# Altium PCB SiC BOOST CONVERTER.PcbDoc
Units mil, origin at the board's own origin, x right, y up, seen from the top; angles counter-clockwise.
Board outline 6000 x 4000 mil, 2 copper layers (Top Layer, Bottom Layer); 78 components, 53 nets, 191 pads, 0 vias.
Unrouted connection lines stored in the file: 137.
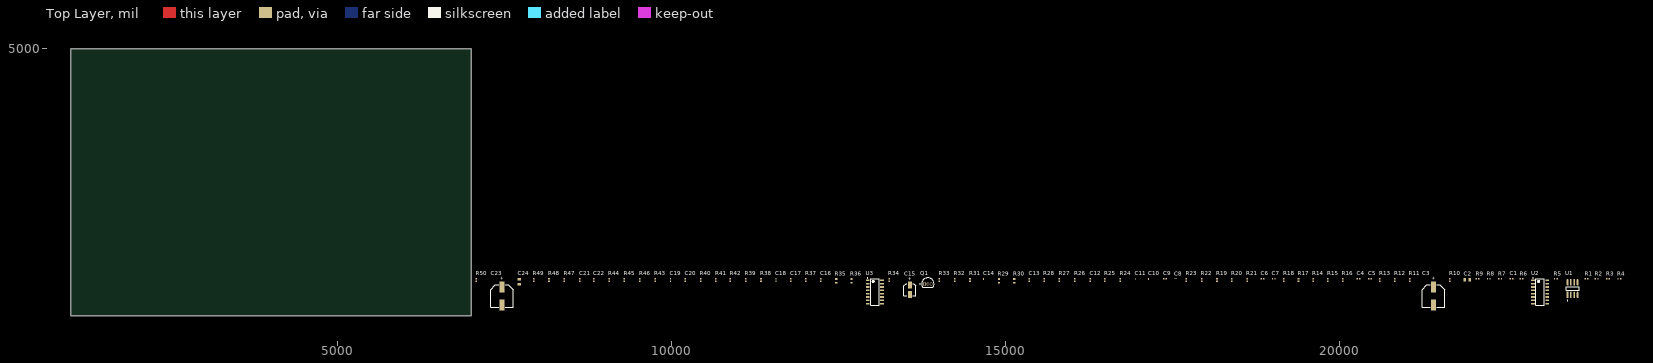
[diagram p0: Top Layer view]
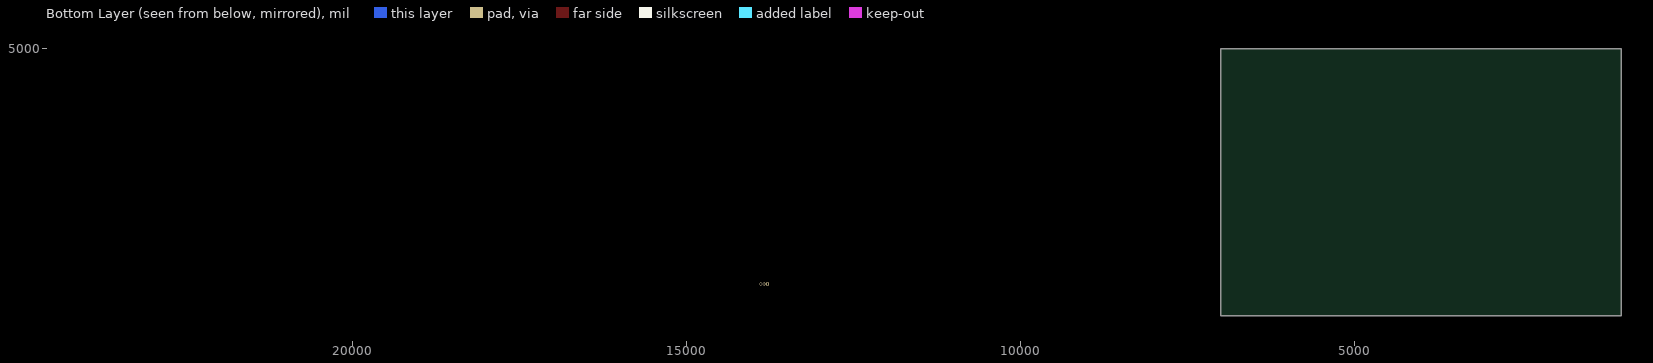
[diagram p1: Bottom Layer view, seen from below]

## Layer stack, top to bottom
Top Solder: solder mask 0.4, Solder Resist, Dk 3.5
Top Layer: signal copper 1.4
Dielectric 1: dielectric 12.6, FR-4, Dk 4.8
Bottom Layer: signal copper 1.4
Bottom Solder: solder mask 0.4, Solder Resist, Dk 3.5

## Board outline
1000,1000 7000,1000 7000,5000 1000,5000

## Design rules (kind name [scope] priority, off if disabled: settings)
Clearance [All] p1: gap=10 ignorepadtopadclearanceinfootprint=FALSE
PolygonConnect [All] p1: connectstyle=Relief reliefconductorwidth=10 reliefentries=4 polygonreliefangle="90 Angle" airgapwidth=10
RoutingVias [All] p1: holewidth=28 width=50 viastyle="Through Hole" minholewidth=28 minwidth=50 maxholewidth=28 maxwidth=50
SolderMaskExpansion [All] p1: expansion=4 istentingtop=FALSE
Width [All] p1: maxlimit=10 minlimit=10 preferedwidth=10
30 further rules are at their usual default settings.

## Components (designator, comment, footprint, x,y, rotation, side; value= is the part's Value field where it differs from the comment)
C1 "1nF 50V" WCAP-CSGP_0402_L1W0.5H0.5 22580,1555 r0 top
C2 "100nF 50V" WCAP-CSGP_0805_L2W1.25H0.8_Reflow 21920,1535 r0 top
C3 "63V 47uF" WCAP-ASLI_D8H10.5 21410,1295 r90 top
C4 "470pF 25V" WCAP-CSGP_0402_L1W0.5H0.5 20290,1555 r0 top
C5 "470pF 25V" WCAP-CSGP_0402_L1W0.5H0.5 20460,1555 r0 top
C6 "470pF 25V" WCAP-CSGP_0402_L1W0.5H0.5 18850,1555 r0 top
C7 "470pF 25V" WCAP-CSGP_0402_L1W0.5H0.5 19020,1555 r0 top
C8 "10nF 25V" WCAP-CSGP_0201_L0.6W0.3H0.3 17545,1555 r0 top
C9 "100nF 25V" WCAP-CSGP_0402_L1W0.5H0.5 17390,1555 r0 top
C10 "1nF 25V" WCAP-CSGP_0201_L0.6W0.3H0.3 17145,1550 r90 top
C11 "10nF 25V" WCAP-CSGP_0201_L0.6W0.3H0.3 16945,1550 r90 top
C12 "100nF 25V" WCAP-CSGP_0402_L1W0.5H0.5 16270,1535 r90 top
C13 "100nF 25V" WCAP-CSGP_0402_L1W0.5H0.5 15360,1535 r90 top
C14 "1nF 25V" WCAP-CSGP_0201_L0.6W0.3H0.3 14675,1550 r90 top
C15 "25V 10uF" WCAP-AS5H_D4H5.5 13570,1390 r90 top
C16 "100nF 25V" WCAP-CSGP_0402_L1W0.5H0.5 12235,1535 r90 top
C17 "100nF 25V" WCAP-CSGP_0402_L1W0.5H0.5 11785,1535 r90 top
C18 "100nF 25V" WCAP-CSGP_0402_L1W0.5H0.5 11565,1535 r90 top
C19 "470pF 25V" WCAP-CSGP_0402_L1W0.5H0.5 9985,1535 r90 top
C20 "470pF 25V" WCAP-CSGP_0402_L1W0.5H0.5 10205,1535 r90 top
C21 "470pF 25V" WCAP-CSGP_0402_L1W0.5H0.5 8625,1535 r90 top
C22 "470pF 25V" WCAP-CSGP_0402_L1W0.5H0.5 8835,1535 r90 top
C23 "63V 47uF" WCAP-ASLI_D8H10.5 7460,1295 r90 top
C24 "100nF 50V" WCAP-CSGP_0805_L2W1.25H0.8_Reflow 7720,1510 r90 top
Q1 "TS431" TO-92 13840,1475 r0 top value=Shunt
R1 "100KΩ" WRIS-RSKS_0402 23705,1550 r0 top
R2 "100KΩ" WRIS-RSKS_0402 23855,1550 r0 top
R3 "100KΩ" WRIS-RSKS_0402 24025,1550 r0 top
R4 "100KΩ" WRIS-RSKS_0402 24195,1550 r0 top
R5 "28KΩ" WRIS-RSKS_0402 23245,1550 r0 top
R6 "88.7KΩ" WRIS-RSKS_0402 22730,1550 r0 top
R7 "100KΩ" WRIS-RSKS_0402 22410,1550 r0 top
R8 "28KΩ" WRIS-RSKS_0402 22240,1550 r0 top
R9 "200KΩ" WRIS-RSKS_0402 22070,1550 r0 top
R10 "27KΩ" WRIS-RSKS_0402 21655,1535 r90 top
R11 "22.1KΩ" WRIS-RSKS_0402 21055,1535 r90 top
R12 "100KΩ" WRIS-RSKS_0402 20835,1535 r90 top
R13 "4.7KΩ" WRIS-RSKS_0402 20610,1535 r90 top
R14 "20Ω" WRIS-RSKS_0402 19610,1535 r90 top
R15 "20Ω" WRIS-RSKS_0402 19830,1535 r90 top
R16 "20Ω" WRIS-RSKS_0402 20050,1535 r90 top
R17 "4.7KΩ" WRIS-RSKS_0402 19390,1535 r90 top
R18 "100KΩ" WRIS-RSKS_0402 19170,1535 r90 top
R19 "20Ω" WRIS-RSKS_0402 18170,1535 r90 top
R20 "20Ω" WRIS-RSKS_0402 18390,1535 r90 top
R21 "20Ω" WRIS-RSKS_0402 18620,1535 r90 top
R22 "100KΩ" WRIS-RSKS_0402 17940,1535 r90 top
R23 "330KΩ" WRIS-RSKS_0402 17710,1535 r90 top
R24 "100KΩ" WRIS-RSKS_0402 16720,1535 r90 top
R25 "28KΩ" WRIS-RSKS_0402 16490,1535 r90 top
R26 "1KΩ" WRIS-RSKS_0402 16040,1535 r90 top
R27 "2KΩ" WRIS-RSKS_0402 15810,1535 r90 top
R28 "28KΩ" WRIS-RSKS_0402 15580,1535 r90 top
R29 "75KΩ" WRIS-RSKS_0603_Reflow 14905,1520 r90 top
R30 "75KΩ" WRIS-RSKS_0603_Reflow 15135,1520 r90 top
R31 "22Ω" WRIS-RSKS_0402 14470,1535 r90 top
R32 "56KΩ" WRIS-RSKS_0402 14240,1535 r90 top
R33 "1KΩ" WRIS-RSKS_0402 14010,1535 r90 top
R34 "10KΩ" WRIS-RSKS_0402 13260,1535 r90 top
R35 "75KΩ" WRIS-RSKS_0603_Reflow 12465,1520 r90 top
R36 "75KΩ" WRIS-RSKS_0603_Reflow 12695,1520 r90 top
R37 "1KΩ" WRIS-RSKS_0402 12010,1535 r90 top
R38 "330KΩ" WRIS-RSKS_0402 11340,1535 r90 top
R39 "4.7KΩ" WRIS-RSKS_0402 11110,1535 r90 top
R40 "20Ω" WRIS-RSKS_0402 10435,1535 r90 top
R41 "20Ω" WRIS-RSKS_0402 10665,1535 r90 top
R42 "20Ω" WRIS-RSKS_0402 10880,1535 r90 top
R43 "4.7KΩ" WRIS-RSKS_0402 9755,1535 r90 top
R44 "20Ω" WRIS-RSKS_0402 9065,1535 r90 top
R45 "20Ω" WRIS-RSKS_0402 9295,1535 r90 top
R46 "20Ω" WRIS-RSKS_0402 9525,1535 r90 top
R47 "22.1KΩ" WRIS-RSKS_0402 8395,1535 r90 top
R48 "27KΩ" WRIS-RSKS_0402 8165,1535 r90 top
R49 "200KΩ" WRIS-RSKS_0402 7935,1535 r90 top
R50 "88.7KΩ" WRIS-RSKS_0402 7075,1535 r90 top
U1 "LM358DR" SOIC-08-IPC_A 23495,1405 r90 top value=OPAMP
U2 "UCC28221D" D0016A_N 23010,1355 r0 top value="BOOST PWM"
U3 "UCC28221D" D0016A_N 13045,1355 r0 top value="BOOST PWM"

## Footprints (in the part's own frame and the unit in brackets; to place one, negate y for a bottom-side part, rotate by r counter-clockwise, add the part's x,y. Pads: shape width x height; smd on the part's side, far side on the other; paste and mask are expansions set on the pad)
D0016A_N [mm] "SOIC, 16-Leads, Body 10x4mm, Pitch 1.27mm, IPC Medium Density"
  rrect17% 1.45x0.6 smd: 1(-2.725,4.445) 2(-2.725,3.175) 3(-2.725,1.905) 4(-2.725,0.635) 5(-2.725,-0.635) 6(-2.725,-1.905) 7(-2.725,-3.175) 8(-2.725,-4.445) 9(2.725,-4.445) 10(2.725,-3.175) 11(2.725,-1.905) 12(2.725,-0.635) 13(2.725,0.635) 14(2.725,1.905) 15(2.725,3.175) 16(2.725,4.445)
  silkscreen extent -2.85,-5 1.6,5.42, body extent -3,-4.95 3,4.95, height 1.59
SOIC-08-IPC_A [mil]
  rect 97.4x24.54 smd paste+0 mask+0: 1(-95.12,75)
  rrect100% 97.4x24.54 smd paste+0 mask+0: 2(-95.12,25) 3(-95.12,-25) 4(-95.12,-75) 5(95.12,-75) 6(95.12,-25) 7(95.12,25) 8(95.12,75)
  silkscreen extent -184,-96 27,96, body extent -164,-116 164,116, height 10
TO-92 [mm] "TO, 3-Leads, Body Dia 4.7mm, Pitch 1.27mm"
  rect 1.05x1.05 hole 0.8: 1(-1.27,0)
  round 1.05 hole 0.8: 2(0,0) 3(1.27,0)
  silkscreen extent -3.07,-1.34 2.35,2.35, body extent -2.35,-1.33 2.36,2.36, height 7.87
WCAP-AS5H_D4H5.5 [mm] "Aluminum Electrolytic Capacitors, 4x5.5mm"
  rect 2.6x1.6 smd: 1(1.8,0) 2(-1.8,0)
  silkscreen extent -2.25,-2.25 2.25,2.25, body extent -2.5,-2.15 2.5,2.15, height 5.5
WCAP-ASLI_D8H10.5 [mm] "Aluminium Electrolytic V-Chip SMT Capacitors, 8x10.5mm"
  rect 4.2x1.9 smd: 1(3.5,0) 2(-3.5,0)
  silkscreen extent -4.25,-4.25 4.25,4.25, body extent -4.5,-4.15 4.5,4.15, height 10.5
WCAP-CSGP_0201_L0.6W0.3H0.3 [mm] "Ceramic Capacitors, body 0.60x0.30mm"
  rect 0.21x0.3 smd: 1(-0.22,0) 2(0.22,0)
  body extent -0.3,-0.15 0.3,0.15, height 0.3
WCAP-CSGP_0402_L1W0.5H0.5 [mm] "Ceramic Capacitors, body 1x0.5mm"
  rect 0.5x0.5 smd: 1(-0.5,0) 2(0.5,0)
  body extent -0.5,-0.25 0.5,0.25, height 0.5
WCAP-CSGP_0805_L2W1.25H0.8_Reflow [mm] "Ceramic Capacitors, body 2x1.25mm"
  rect 0.9x1.3 smd: 1(-0.95,0) 2(0.95,0)
  body extent -1,-0.62 1,0.63, height 0.8
WRIS-RSKS_0402 [mm] "Fixed Thick Film, body 1.00 x 0.50 mm"
  rect 0.5x0.6 smd: 1(-0.5,0) 2(0.5,0)
  body extent -0.5,-0.25 0.5,0.25, height 0.35
WRIS-RSKS_0603_Reflow [mm] "Fixed Thick Film, body 1.60 x 0.80 mm"
  rect 0.6x0.9 smd: 1(-0.75,0) 2(0.75,0)
  body extent -0.8,-0.4 0.8,0.4, height 0.45

## Part data
C1: library part 885012005067, "WCAP-CSGP Multilayer Ceramic Chip Capacitor, General Purpose, size 0402, NP0, 1nF, 50VDC", Capacitance=1nF, Capacitance Tolerance=+/-5%, Case/Size Code=0402, Insulation Resistance=10GOhm, Manufacturer="Wurth Elektronik", Operating Temperature Max=125°C, Operating Temperature Min=-55°C, Rated Voltage (DC)=50V, Category="Multilayer Ceramic Chip Capacitors", Ceramic Type=NP0, ComponentLink1Description="Website Link", ComponentLink1URL=https://www.we-online.com/redexpert/article/885012005067?ad, ComponentLink2Description="Datasheet Link", ComponentLink2URL=https://www.we-online.com/redexpert/spec/885012005067?ad, Height=0.5mm, Length=1mm, Manufacturer Part Number=885012005067, Match Code=WCAP-CSGP, Mount="Surface Mount", Packaging="Tape and Reel", Q Factor=1000, Technical Reference=NP00402102J050DFCT10000, Width=0.5mm, Simulation ModelName=0402_885012005067_1nF, Simulation PortMap=(1:1),(2:2)
C2 C24: library part 885012207098, "WCAP-CSGP Multilayer Ceramic Chip Capacitor, General Purpose, size 0805, X7R, 100nF, 50VDC", Capacitance=100nF, Capacitance Tolerance=+/-10%, Case/Size Code=0805, Insulation Resistance=5GOhm, Manufacturer="Wurth Elektronik", Operating Temperature Max=125°C, Operating Temperature Min=-55°C, Rated Voltage (DC)=50V, Category="Multilayer Ceramic Chip Capacitors", Ceramic Type=X7R, ComponentLink1Description="Website Link", ComponentLink1URL=https://www.we-online.com/redexpert/article/885012207098?ad, ComponentLink2Description="Datasheet Link", ComponentLink2URL=https://www.we-online.com/redexpert/spec/885012207098?ad, Dissipation Factor=2.5%, Height=0.8mm, Length=2mm, Manufacturer Part Number=885012207098, Match Code=WCAP-CSGP, Mount="Surface Mount", Packaging="Tape and Reel", Technical Reference=X7R0805104K050DFCT10000, Width=1.25mm, Simulation ModelName=0805_885012207098_100nF, Simulation PortMap=(1:1),(2:2)
C3 C23: library part 865080753013, "WCAP-ASLI Aluminum Electrolytic Capacitor, V-Chip, D8 x H10.5mm, 47uF, 63V", Capacitance=47uF, Capacitance Tolerance=+/-20%, Leakage Current=29.61uA, Manufacturer="Wurth Elektronik", Operating Temperature Max=105°C, Operating Temperature Min=-55°C, Rated Voltage (DC)=63V, Ripple Current=119mA, Category="Aluminum Electrolytic Capacitors", ComponentLink1Description="Website Link", ComponentLink1URL=https://www.we-online.com/redexpert/article/865080753013?ad, ComponentLink2Description="Datasheet Link", ComponentLink2URL=https://www.we-online.com/redexpert/spec/865080753013?ad, Diameter=8mm, Dissipation Factor=12%, Endurance=2000h, Height=10.5mm, Manufacturer Part Number=865080753013, Match Code=WCAP-ASLI, Mount="Surface Mount", Packaging="Tape and Reel", Technical Reference=ASEE105470M063DVCTEB000, Simulation ModelName=865080753013_47uF, Simulation PortMap=(1:1),(2:2)
C4 C5 C6 C7 C19 C20 C21 C22: library part 885012205042, "WCAP-CSGP Multilayer Ceramic Chip Capacitor, General Purpose, size 0402, X7R, 470pF, 25VDC", Capacitance=470pF, Capacitance Tolerance=+/-10%, Case/Size Code=0402, Insulation Resistance=10GOhm, Manufacturer="Wurth Elektronik", Operating Temperature Max=125°C, Operating Temperature Min=-55°C, Rated Voltage (DC)=25V, Category="Multilayer Ceramic Chip Capacitors", Ceramic Type=X7R, ComponentLink1Description="Website Link", ComponentLink1URL=https://www.we-online.com/redexpert/article/885012205042?ad, ComponentLink2Description="Datasheet Link", ComponentLink2URL=https://www.we-online.com/redexpert/spec/885012205042?ad, Dissipation Factor=3.5%, Height=0.5mm, Length=1mm, Manufacturer Part Number=885012205042, Match Code=WCAP-CSGP, Mount="Surface Mount", Packaging="Tape and Reel", Technical Reference=X7R0402471K025DFCT10000, Width=0.5mm, Simulation ModelName=0402_885012205042_470pF, Simulation PortMap=(1:1),(2:2)
C8 C11: library part 885012204004, "WCAP-CSGP Multilayer Ceramic Chip Capacitor, General Purpose, size 0201, X7R Class II, 10nF, 25VDC", Capacitance=10nF, Capacitance Tolerance=+/-10%, Case/Size Code=0201, Insulation Resistance=10GOhm, Manufacturer="Wurth Elektronik", Operating Temperature Max=125°C, Operating Temperature Min=-55°C, Rated Voltage (DC)=25V, Category="Multilayer Ceramic Chip Capacitors", Ceramic Type="X7R Class II", ComponentLink1Description="Website Link", ComponentLink1URL=https://www.we-online.com/redexpert/article/885012204004?ad, ComponentLink2Description="Datasheet Link", ComponentLink2URL=https://www.we-online.com/redexpert/spec/885012204004?ad, Dissipation Factor=10%, Height=0.3mm, Length=0.6mm, Manufacturer Part Number=885012204004, Match Code=WCAP-CSGP, Mount="Surface Mount", Packaging="Tape and Reel", Technical Reference=X7R0201103K025DFCT10000, Width=0.3mm, Simulation ModelName=0201_885012204004_10nF, Simulation PortMap=(1:1),(2:2)
C9 C12 C13 C16 C17 C18: library part 885012205085R, "WCAP-CSGP Multilayer Ceramic Chip Capacitor, General Purpose, size 0402, X7R, 100nF, 25VDC", Capacitance=100nF, Capacitance Tolerance=+/-10%, Case/Size Code=0402, Insulation Resistance=5GOhm, Manufacturer="Wurth Elektronik", Operating Temperature Max=125°C, Operating Temperature Min=-55°C, Rated Voltage (DC)=25V, Category="Multilayer Ceramic Chip Capacitors", Ceramic Type=X7R, ComponentLink1Description="Website Link", ComponentLink1URL=https://www.we-online.com/redexpert/article/885012205085R?ad, ComponentLink2Description="Datasheet Link", ComponentLink2URL=https://www.we-online.com/redexpert/spec/885012205085R?ad, Dissipation Factor=10%, Height=0.5mm, Length=1mm, Manufacturer Part Number=885012205085R, Match Code=WCAP-CSGP, Mount="Surface Mount", Packaging="Tape and Reel", Technical Reference=X7R0402104K025DFCT20000, Width=0.5mm, Simulation ModelName=0402_885012205085R_100nF, Simulation PortMap=(1:1),(2:2)
C10 C14: library part 885012204006, "WCAP-CSGP Multilayer Ceramic Chip Capacitor, General Purpose, size 0201, X7R Class II, 1nF, 25VDC", Capacitance=1nF, Capacitance Tolerance=+/-10%, Case/Size Code=0201, Insulation Resistance=10GOhm, Manufacturer="Wurth Elektronik", Operating Temperature Max=125°C, Operating Temperature Min=-55°C, Rated Voltage (DC)=25V, Category="Multilayer Ceramic Chip Capacitors", Ceramic Type="X7R Class II", ComponentLink1Description="Website Link", ComponentLink1URL=https://www.we-online.com/redexpert/article/885012204006?ad, ComponentLink2Description="Datasheet Link", ComponentLink2URL=https://www.we-online.com/redexpert/spec/885012204006?ad, Dissipation Factor=3.5%, Height=0.3mm, Length=0.6mm, Manufacturer Part Number=885012204006, Match Code=WCAP-CSGP, Mount="Surface Mount", Packaging="Tape and Reel", Technical Reference=X7R0201102K025DFCT10000, Width=0.3mm, Simulation ModelName=0201_885012204006_1nF, Simulation PortMap=(1:1),(2:2)
C15: library part 865230440002, "WCAP-AS5H Aluminum Electrolytic Capacitor, V-Chip, D4 x H5.5mm, 10µF, 25V", Capacitance=10uF, Capacitance Tolerance=+/-20%, Leakage Current=3uA, Manufacturer="Wurth Elektronik", Operating Temperature Max=105°C, Operating Temperature Min=-40°C, Rated Voltage (DC)=25V, Ripple Current=23mA, Category="Aluminum Electrolytic Capacitors", ComponentLink1Description="Website Link", ComponentLink1URL=https://www.we-online.com/redexpert/article/865230440002?ad, ComponentLink2Description="Datasheet Link", ComponentLink2URL=https://www.we-online.com/redexpert/spec/865230440002?ad, Diameter=4mm, Dissipation Factor=16%, Endurance=5000h, Height=5.5mm, Manufacturer Part Number=865230440002, Match Code=WCAP-AS5H, Mount="Surface Mount", Packaging="Tape and Reel", Technical Reference=ASDB055100M025DVCTAE000, Simulation ModelName=865230440002_10uF, Simulation PortMap=(1:1),(2:2)
Q1: library part TS431IZT, "V-Ref Adjustable 1.24V to 6V 30mA 3-Pin TO-92 T/R", Manufacturer=STMicroelectronics, Supplier Part Number=497-TS431IZTCT-ND, Category="Voltage References", ComponentLink1Description=https://datasheet.ciiva.com/41457/001185892-da-01-en-ic-vref-shunt-prec-ts431izt-to-92-3-stm-41457263.pdf?src-supplier=Conrad, ComponentLink1URL=https://datasheet.ciiva.com/41457/001185892-da-01-en-ic-vref-shunt-prec-ts431izt-to-92-3-stm-41457263.pdf?src-supplier=Conrad, ComponentLink2Description=https://datasheet.ciiva.com/4909/cd00001336-4909386.pdf?src-supplier=Mouser, ComponentLink2URL=https://datasheet.ciiva.com/4909/cd00001336-4909386.pdf?src-supplier=Mouser, ComponentLink3Description=https://datasheet.ciiva.com/2006/cd00001336-2006690.pdf?src-supplier=Digikey, ComponentLink3URL=https://datasheet.ciiva.com/2006/cd00001336-2006690.pdf?src-supplier=Digikey, ComponentLink4Description=https://datasheet.ciiva.com/2006/cd00001336-2006691.pdf?src-supplier=Digikey, ComponentLink4URL=https://datasheet.ciiva.com/2006/cd00001336-2006691.pdf?src-supplier=Digikey, Manufacturer Part Number=TS431IZT, Pricing="1=0.81, 10=0.714, 25=0.6708, 100=0.5476, 250=0.50864, 500=0.43288, 1000=0.34631 (USD)", RoHS=Yes, Stock=2472, Supplier=Digikey
R1 R2 R3 R4 R7 R12 R18 R22 R24: library part 560112110019, "WRIS-RSKS Thick Film Resistor, size 0402, 100000Ohm, 100mW", Case/Size Code=0402, Limiting Element Voltage=50V, Manufacturer="Wurth Elektronik", Operating Temperature Max=155°C, Operating Temperature Min=-55°C, Rated Power=100mW, Resistance=100000Ohm, Resistance Tolerance=+/-1%, Temperature Coefficient of Resistance Max=100ppm/°C, Temperature Coefficient of Resistance Min=-100ppm/°C, Category="Thick Film Resistors", ComponentLink1Description="Website Link", ComponentLink1URL=https://www.we-online.com/redexpert/article/560112110019?ad, ComponentLink2Description="Datasheet Link", ComponentLink2URL=https://www.we-online.com/redexpert/spec/560112110019?ad, Height=0.35mm, Length=1mm, Manufacturer Part Number=560112110019, Match Code=WRIS-RSKS, Mount="Surface Mount", Packaging="Tape and Reel", Width=0.5mm
R5 R8 R25 R28: library part 560112110228, "WRIS-RSKS Thick Film Resistor, size 0402, 28000Ohm, 100mW", Case/Size Code=0402, Limiting Element Voltage=50V, Manufacturer="Wurth Elektronik", Operating Temperature Max=155°C, Operating Temperature Min=-55°C, Rated Power=100mW, Resistance=28000Ohm, Resistance Tolerance=+/-1%, Temperature Coefficient of Resistance Max=100ppm/°C, Temperature Coefficient of Resistance Min=-100ppm/°C, Category="Thick Film Resistors", ComponentLink1Description="Website Link", ComponentLink1URL=https://www.we-online.com/redexpert/article/560112110228?ad, ComponentLink2Description="Datasheet Link", ComponentLink2URL=https://www.we-online.com/redexpert/spec/560112110228?ad, Height=0.35mm, Length=1mm, Manufacturer Part Number=560112110228, Match Code=WRIS-RSKS, Mount="Surface Mount", Packaging="Tape and Reel", Width=0.5mm
R6 R50: library part 560112110139, "WRIS-RSKS Thick Film Resistor, size 0402, 88700Ohm, 100mW", Case/Size Code=0402, Limiting Element Voltage=50V, Manufacturer="Wurth Elektronik", Operating Temperature Max=155°C, Operating Temperature Min=-55°C, Rated Power=100mW, Resistance=88700Ohm, Resistance Tolerance=+/-1%, Temperature Coefficient of Resistance Max=100ppm/°C, Temperature Coefficient of Resistance Min=-100ppm/°C, Category="Thick Film Resistors", ComponentLink1Description="Website Link", ComponentLink1URL=https://www.we-online.com/redexpert/article/560112110139?ad, ComponentLink2Description="Datasheet Link", ComponentLink2URL=https://www.we-online.com/redexpert/spec/560112110139?ad, Height=0.35mm, Length=1mm, Manufacturer Part Number=560112110139, Match Code=WRIS-RSKS, Mount="Surface Mount", Packaging="Tape and Reel", Width=0.5mm
R9 R49: library part 560112110041, "WRIS-RSKS Thick Film Resistor, size 0402, 200000Ohm, 100mW", Case/Size Code=0402, Limiting Element Voltage=50V, Manufacturer="Wurth Elektronik", Operating Temperature Max=155°C, Operating Temperature Min=-55°C, Rated Power=100mW, Resistance=200000Ohm, Resistance Tolerance=+/-1%, Temperature Coefficient of Resistance Max=100ppm/°C, Temperature Coefficient of Resistance Min=-100ppm/°C, Category="Thick Film Resistors", ComponentLink1Description="Website Link", ComponentLink1URL=https://www.we-online.com/redexpert/article/560112110041?ad, ComponentLink2Description="Datasheet Link", ComponentLink2URL=https://www.we-online.com/redexpert/spec/560112110041?ad, Height=0.35mm, Length=1mm, Manufacturer Part Number=560112110041, Match Code=WRIS-RSKS, Mount="Surface Mount", Packaging="Tape and Reel", Width=0.5mm
R10 R48: library part 560112110026, "WRIS-RSKS Thick Film Resistor, size 0402, 27000Ohm, 100mW", Case/Size Code=0402, Limiting Element Voltage=50V, Manufacturer="Wurth Elektronik", Operating Temperature Max=155°C, Operating Temperature Min=-55°C, Rated Power=100mW, Resistance=27000Ohm, Resistance Tolerance=+/-1%, Temperature Coefficient of Resistance Max=100ppm/°C, Temperature Coefficient of Resistance Min=-100ppm/°C, Category="Thick Film Resistors", ComponentLink1Description="Website Link", ComponentLink1URL=https://www.we-online.com/redexpert/article/560112110026?ad, ComponentLink2Description="Datasheet Link", ComponentLink2URL=https://www.we-online.com/redexpert/spec/560112110026?ad, Height=0.35mm, Length=1mm, Manufacturer Part Number=560112110026, Match Code=WRIS-RSKS, Mount="Surface Mount", Packaging="Tape and Reel", Width=0.5mm
R11 R47: library part 560112110099, "WRIS-RSKS Thick Film Resistor, size 0402, 22100Ohm, 100mW", Case/Size Code=0402, Limiting Element Voltage=50V, Manufacturer="Wurth Elektronik", Operating Temperature Max=155°C, Operating Temperature Min=-55°C, Rated Power=100mW, Resistance=22100Ohm, Resistance Tolerance=+/-1%, Temperature Coefficient of Resistance Max=100ppm/°C, Temperature Coefficient of Resistance Min=-100ppm/°C, Category="Thick Film Resistors", ComponentLink1Description="Website Link", ComponentLink1URL=https://www.we-online.com/redexpert/article/560112110099?ad, ComponentLink2Description="Datasheet Link", ComponentLink2URL=https://www.we-online.com/redexpert/spec/560112110099?ad, Height=0.35mm, Length=1mm, Manufacturer Part Number=560112110099, Match Code=WRIS-RSKS, Mount="Surface Mount", Packaging="Tape and Reel", Width=0.5mm
R13 R17 R39 R43: library part 560112110018, "WRIS-RSKS Thick Film Resistor, size 0402, 4700Ohm, 100mW", Case/Size Code=0402, Limiting Element Voltage=50V, Manufacturer="Wurth Elektronik", Operating Temperature Max=155°C, Operating Temperature Min=-55°C, Rated Power=100mW, Resistance=4700Ohm, Resistance Tolerance=+/-5%, Temperature Coefficient of Resistance Max=100ppm/°C, Temperature Coefficient of Resistance Min=-100ppm/°C, Category="Thick Film Resistors", ComponentLink1Description="Website Link", ComponentLink1URL=https://www.we-online.com/redexpert/article/560112110018?ad, ComponentLink2Description="Datasheet Link", ComponentLink2URL=https://www.we-online.com/redexpert/spec/560112110018?ad, Height=0.35mm, Length=1mm, Manufacturer Part Number=560112110018, Match Code=WRIS-RSKS, Mount="Surface Mount", Packaging="Tape and Reel", Width=0.5mm
R14 R15 R16 R19 R20 R21 R40 R41 R42 R44 R45 R46: library part 560112110083, "WRIS-RSKS Thick Film Resistor, size 0402, 20Ohm, 100mW", Case/Size Code=0402, Limiting Element Voltage=50V, Manufacturer="Wurth Elektronik", Operating Temperature Max=155°C, Operating Temperature Min=-55°C, Rated Power=100mW, Resistance=20Ohm, Resistance Tolerance=+/-1%, Temperature Coefficient of Resistance Max=100ppm/°C, Temperature Coefficient of Resistance Min=-100ppm/°C, Category="Thick Film Resistors", ComponentLink1Description="Website Link", ComponentLink1URL=https://www.we-online.com/redexpert/article/560112110083?ad, ComponentLink2Description="Datasheet Link", ComponentLink2URL=https://www.we-online.com/redexpert/spec/560112110083?ad, Height=0.35mm, Length=1mm, Manufacturer Part Number=560112110083, Match Code=WRIS-RSKS, Mount="Surface Mount", Packaging="Tape and Reel", Width=0.5mm
R23 R38: library part 560112110088, "WRIS-RSKS Thick Film Resistor, size 0402, 330000Ohm, 100mW", Case/Size Code=0402, Limiting Element Voltage=50V, Manufacturer="Wurth Elektronik", Operating Temperature Max=155°C, Operating Temperature Min=-55°C, Rated Power=100mW, Resistance=330000Ohm, Resistance Tolerance=+/-1%, Temperature Coefficient of Resistance Max=100ppm/°C, Temperature Coefficient of Resistance Min=-100ppm/°C, Category="Thick Film Resistors", ComponentLink1Description="Website Link", ComponentLink1URL=https://www.we-online.com/redexpert/article/560112110088?ad, ComponentLink2Description="Datasheet Link", ComponentLink2URL=https://www.we-online.com/redexpert/spec/560112110088?ad, Height=0.35mm, Length=1mm, Manufacturer Part Number=560112110088, Match Code=WRIS-RSKS, Mount="Surface Mount", Packaging="Tape and Reel", Width=0.5mm
R26 R33 R37: library part 560112110012, "WRIS-RSKS Thick Film Resistor, size 0402, 1000Ohm, 100mW", Case/Size Code=0402, Limiting Element Voltage=50V, Manufacturer="Wurth Elektronik", Operating Temperature Max=155°C, Operating Temperature Min=-55°C, Rated Power=100mW, Resistance=1000Ohm, Resistance Tolerance=+/-1%, Temperature Coefficient of Resistance Max=100ppm/°C, Temperature Coefficient of Resistance Min=-100ppm/°C, Category="Thick Film Resistors", ComponentLink1Description="Website Link", ComponentLink1URL=https://www.we-online.com/redexpert/article/560112110012?ad, ComponentLink2Description="Datasheet Link", ComponentLink2URL=https://www.we-online.com/redexpert/spec/560112110012?ad, Height=0.35mm, Length=1mm, Manufacturer Part Number=560112110012, Match Code=WRIS-RSKS, Mount="Surface Mount", Packaging="Tape and Reel", Width=0.5mm
R27: library part 560112110064, "WRIS-RSKS Thick Film Resistor, size 0402, 2000Ohm, 100mW", Case/Size Code=0402, Limiting Element Voltage=50V, Manufacturer="Wurth Elektronik", Operating Temperature Max=155°C, Operating Temperature Min=-55°C, Rated Power=100mW, Resistance=2000Ohm, Resistance Tolerance=+/-1%, Temperature Coefficient of Resistance Max=100ppm/°C, Temperature Coefficient of Resistance Min=-100ppm/°C, Category="Thick Film Resistors", ComponentLink1Description="Website Link", ComponentLink1URL=https://www.we-online.com/redexpert/article/560112110064?ad, ComponentLink2Description="Datasheet Link", ComponentLink2URL=https://www.we-online.com/redexpert/spec/560112110064?ad, Height=0.35mm, Length=1mm, Manufacturer Part Number=560112110064, Match Code=WRIS-RSKS, Mount="Surface Mount", Packaging="Tape and Reel", Width=0.5mm
R29 R30 R35 R36: library part 560112116063, "WRIS-RSKS Thick Film Resistor, size 0603, 75000Ohm, 100mW", Case/Size Code=0603, Limiting Element Voltage=75V, Manufacturer="Wurth Elektronik", Operating Temperature Max=155°C, Operating Temperature Min=-55°C, Rated Power=100mW, Resistance=75000Ohm, Resistance Tolerance=+/-1%, Temperature Coefficient of Resistance Max=100ppm/°C, Temperature Coefficient of Resistance Min=-100ppm/°C, Category="Thick Film Resistors", ComponentLink1Description="Website Link", ComponentLink1URL=https://www.we-online.com/redexpert/article/560112116063?ad, ComponentLink2Description="Datasheet Link", ComponentLink2URL=https://www.we-online.com/redexpert/spec/560112116063?ad, Height=0.45mm, Length=1.6mm, Manufacturer Part Number=560112116063, Match Code=WRIS-RSKS, Mount="Surface Mount", Packaging="Tape and Reel", Width=0.8mm
R31: library part 560112110046, "WRIS-RSKS Thick Film Resistor, size 0402, 22Ohm, 100mW", Case/Size Code=0402, Limiting Element Voltage=50V, Manufacturer="Wurth Elektronik", Operating Temperature Max=155°C, Operating Temperature Min=-55°C, Rated Power=100mW, Resistance=22Ohm, Resistance Tolerance=+/-1%, Temperature Coefficient of Resistance Max=100ppm/°C, Temperature Coefficient of Resistance Min=-100ppm/°C, Category="Thick Film Resistors", ComponentLink1Description="Website Link", ComponentLink1URL=https://www.we-online.com/redexpert/article/560112110046?ad, ComponentLink2Description="Datasheet Link", ComponentLink2URL=https://www.we-online.com/redexpert/spec/560112110046?ad, Height=0.35mm, Length=1mm, Manufacturer Part Number=560112110046, Match Code=WRIS-RSKS, Mount="Surface Mount", Packaging="Tape and Reel", Width=0.5mm
R32: library part 560112110031, "WRIS-RSKS Thick Film Resistor, size 0402, 56000Ohm, 100mW", Case/Size Code=0402, Limiting Element Voltage=50V, Manufacturer="Wurth Elektronik", Operating Temperature Max=155°C, Operating Temperature Min=-55°C, Rated Power=100mW, Resistance=56000Ohm, Resistance Tolerance=+/-1%, Temperature Coefficient of Resistance Max=100ppm/°C, Temperature Coefficient of Resistance Min=-100ppm/°C, Category="Thick Film Resistors", ComponentLink1Description="Website Link", ComponentLink1URL=https://www.we-online.com/redexpert/article/560112110031?ad, ComponentLink2Description="Datasheet Link", ComponentLink2URL=https://www.we-online.com/redexpert/spec/560112110031?ad, Height=0.35mm, Length=1mm, Manufacturer Part Number=560112110031, Match Code=WRIS-RSKS, Mount="Surface Mount", Packaging="Tape and Reel", Width=0.5mm
R34: library part 560112110006, "WRIS-RSKS Thick Film Resistor, size 0402, 10000Ohm, 100mW", Case/Size Code=0402, Limiting Element Voltage=50V, Manufacturer="Wurth Elektronik", Operating Temperature Max=155°C, Operating Temperature Min=-55°C, Rated Power=100mW, Resistance=10000Ohm, Resistance Tolerance=+/-5%, Temperature Coefficient of Resistance Max=100ppm/°C, Temperature Coefficient of Resistance Min=-100ppm/°C, Category="Thick Film Resistors", ComponentLink1Description="Website Link", ComponentLink1URL=https://www.we-online.com/redexpert/article/560112110006?ad, ComponentLink2Description="Datasheet Link", ComponentLink2URL=https://www.we-online.com/redexpert/spec/560112110006?ad, Height=0.35mm, Length=1mm, Manufacturer Part Number=560112110006, Match Code=WRIS-RSKS, Mount="Surface Mount", Packaging="Tape and Reel", Width=0.5mm
U1: library part "LM358 OPAMP", "IC OPAMP GP 2 CIRCUIT 8SOIC", Case/Package=SOIC, Dual Supply Voltage=9V, Input Bias Current=250nA, Input Offset Voltage (Vos)=7mV, Max Dual Supply Voltage=16V, Max Operating Temperature=70°C, Max Supply Voltage=32V, Min Dual Supply Voltage=1.5V, Min Operating Temperature=0°C, Min Supply Voltage=3V, Nominal Supply Current=1.2mA, Operating Supply Current=1mA, Output Current=30mA, Package Quantity=2500, Power Supply Rejection Ratio (PSRR)=65dB, Voltage Gain=100dB, Bandwidth=700kHz, Common Mode Rejection Ratio=65dB, Contact Plating=Gold, Gain Bandwidth Product=700kHz, Height=1.58mm, Lead Free="Lead Free", Length=4.9mm, Mount="Surface Mount", Number of Amplifiers=2, Number of Channels=2, Number of Circuits=2, Number of Elements=2, Number of Pins=8, Operating Supply Voltage=16V, Output Current per Channel=30mA, Packaging="Tape and Reel", Radiation Hardening=No, REACH SVHC="No SVHC", Slew Rate=0.3V/µs, Unity Gain Bandwidth Product=700kHz, Width=3.91mm
U2 U3: "Interleaved Dual PWM Controller with Programmable Max Duty Cycle with Current Control, 90 % Duty Cycle, -40 to +105 degC, 16-pin SOIC (D), Green (RoHS & no Sb/Br)", Frequency(Max)(kHz)=2000, Manufacturer="Texas Instruments", Rating=Catalog, Code_JEDEC=MS-012AC, ComponentLink1Description=Datasheet, ComponentLink1URL=http://www.ti.com/general/docs/lit/getliterature.tsp?genericPartNumber=UCC28221&fileType=pdf, Control Method=Current, DatasheetVersion=SLUS544E, Duty Cycle(Max)(%)=90, Eco-Plan="Green (RoHS & no Sb/Br)", Mounting Technology="Surface Mount", PackageDescription="16-Pin Plastic Small Outline Integrated Circuit, 9.9 x 3.9 mm, Pitch 1.27 mm Pitch", PackageReference=D0016A, PackageVersion="revM, Jun-2011", PartNumber=UCC28221D, Regulated Outputs(#)=2, SubFamily="PWM Controller", Topology="Flyback, Forward", UVLO Thresholds On/Off(V)=13.0/8.0

## Nets (pads, with @x,y where several pads share a name; then routed paths per layer and width w, separated by ;. In a path a pad name is that pad's centre, name@x,y a point inside that pad or via, vN(x,y) a via of type N, cw(c..) or ccw(c..) an arc to the next point about the centre after c; other vN are vias at no path point)
+12V: C2.2 C3.1 C23.1 C24.2 R32.2 U1.8 U2.3 U2.16 U3.3 U3.16
GND: C1.1 C2.1 C3.2 C9.1 C12.2 C13.1 C14.1 C15.2 C16.1 C17.2 C18.1 C23.2 C24.1 R8.1 R11.1 R23.1 R26.2 R28.1 R29.1 R30.1 R34.1 R35.1 R36.1 R37.2 R38.1 R47.1 U1.4 U2.11 U3.11
NetC1_2: C1.2 R1.1 R5.2 U1.3
NetC4_1: C4.1 C5.1 R14.1 R15.1 R16.1
NetC4_2: C4.2 R13.1 R14.2 R15.2 R16.2
NetC5_2: C5.2 R13.2 U2.4
NetC6_1: C6.1 C7.1 R19.1 R20.1 R21.1
NetC6_2: C6.2 R17.1 R19.2 R20.2 R21.2
NetC7_2: C7.2 R17.2 U2.6
NetC8_1: C8.1 C10.2 C11.1 R22.1 R25.2 U1.6
NetC8_2: C8.2 R24.2 R27.1 U1.7
NetC9_2: C9.2 U2.5
NetC10_1: C10.1 C14.2 R31.2 U1.5
NetC11_2: C11.2 R24.1
NetC12_1: C12.1 C17.1 R26.1 R27.2 R37.1 U2.8 U3.8
NetC13_2: C13.2 U2.14
NetC16_2: C16.2 U3.14
NetC18_2: C18.2 U3.5
NetC19_1: C19.1 C20.1 R40.1 R41.1 R42.1
NetC19_2: C19.2 R39.1 R40.2 R41.2 R42.2
NetC20_2: C20.2 R39.2 U3.4
NetC21_1: C21.1 C22.1 R44.1 R45.1 R46.1
NetC21_2: C21.2 R43.1 R44.2 R45.2 R46.2
NetC22_2: C22.2 R43.2 U3.6
NetQ1_3: Q1.3 R33.1 R34.2
NetR1_2: R1.2 R2.1
NetR2_2: R2.2 R3.1
NetR3_2: R3.2 R4.1
NetR4_2: R4.2
NetR5_1: R5.1 R8.2
NetR6_1: R6.1 R9.2 R10.2 U2.15
NetR7_1: R7.1 R12.2
NetR7_2: R7.2
NetR9_1: R9.1 U2.2
NetR10_1: R10.1 R11.2 U2.1
NetR12_1: R12.1 R18.2
NetR18_1: R18.1 R22.2
NetR23_2: R23.2 U2.7
NetR25_1: R25.1 R28.2
NetR29_2: R29.2 U2.9
NetR30_2: R30.2 U2.10
NetR35_2: R35.2 U3.9
NetR36_2: R36.2 U3.10
NetR38_2: R38.2 U3.7
NetR47_2: R47.2 R48.1 U3.1
NetR48_2: R48.2 R49.2 R50.1 U3.15
NetR49_1: R49.1 U3.2
NetU2_12: U2.12
NetU2_13: U2.13
NetU3_12: U3.12
NetU3_13: U3.13
VIN_V_SNS: R6.2 R50.2 U1.1 U1.2
VREF: C15.1 Q1.1 R31.1 R32.1 R33.2
pads on no net: Q1.2

## Text inside footprints (layer, text, board x,y; h text height)
C3: Top Overlay "+" at 21429.69,1527.28 h48 r90
C15: Top Overlay "+" at 13589.68,1523.86 h48 r90
C23: Top Overlay "+" at 7479.69,1527.28 h48 r90